# EAGLE board MCBMiniV5 (EAGLE 5.09)
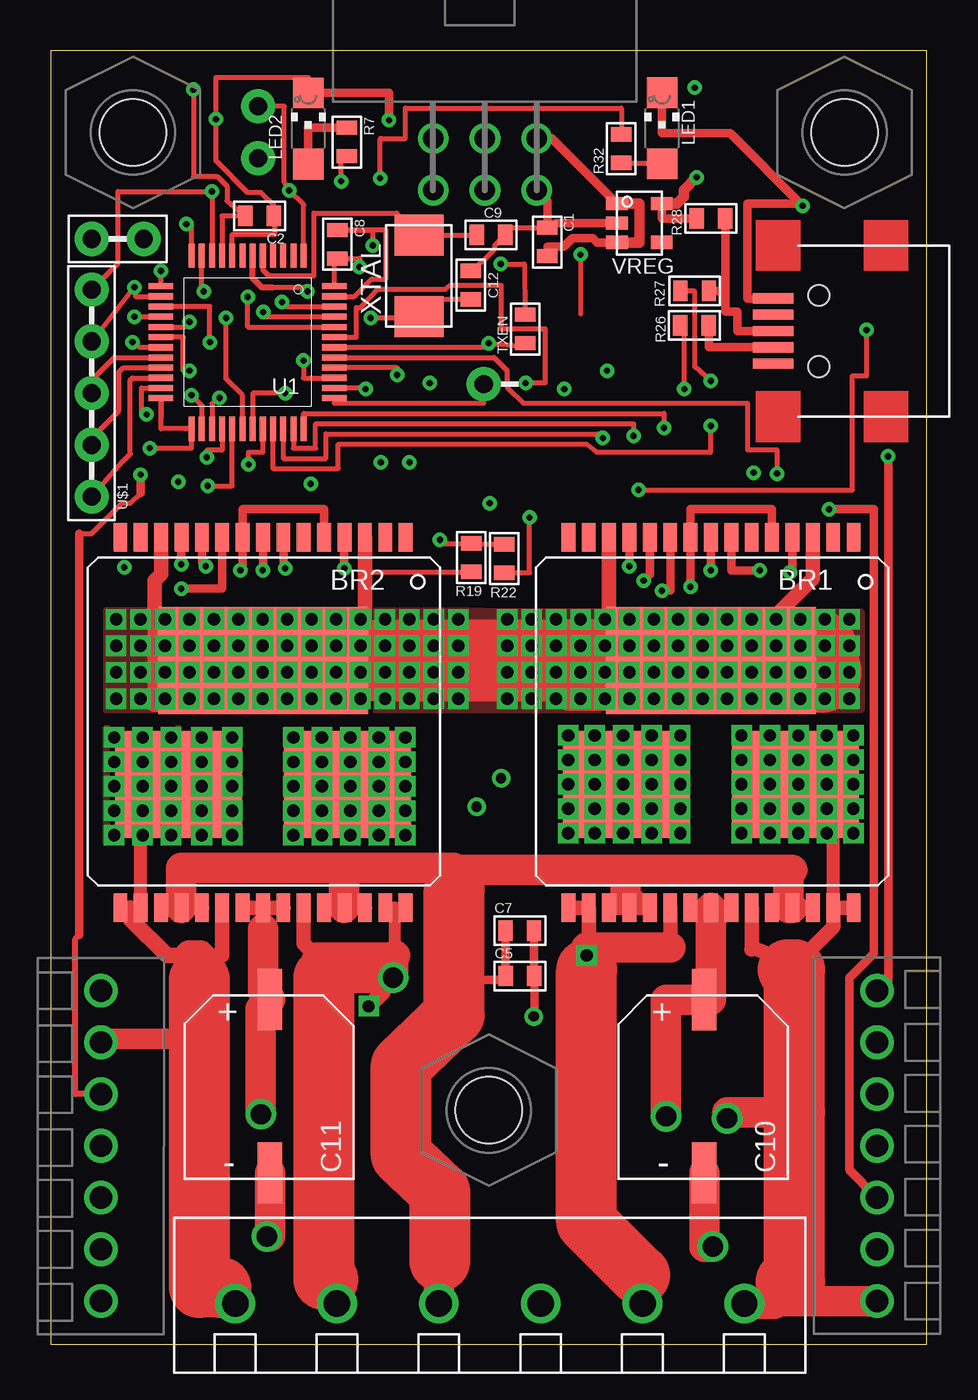
[diagram p0: board, top side]
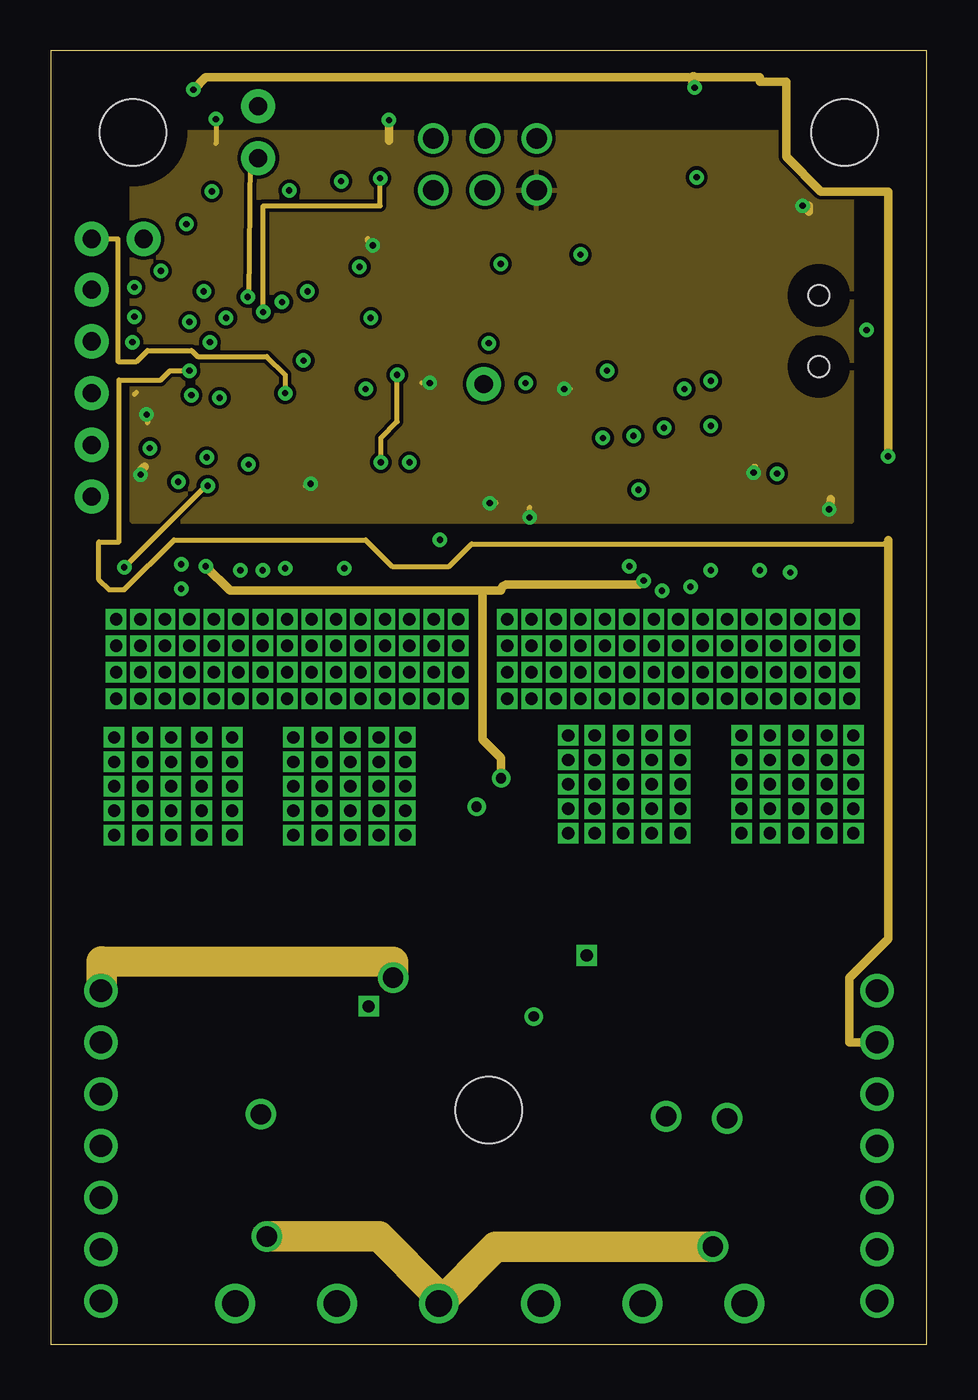
[diagram p1: board, inner layer Route2]
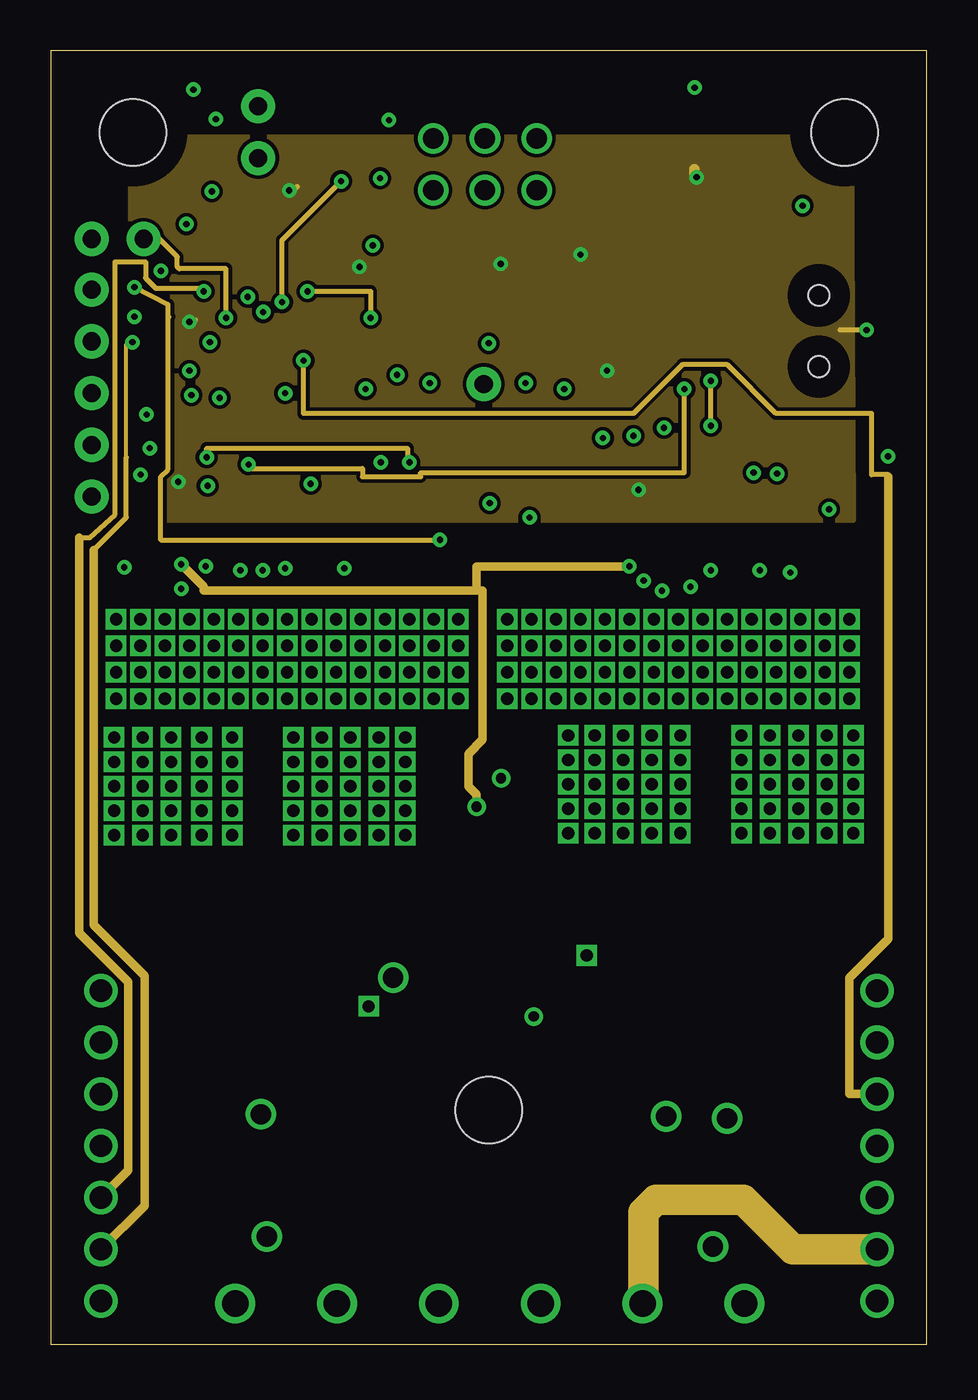
[diagram p2: board, inner layer Route3]
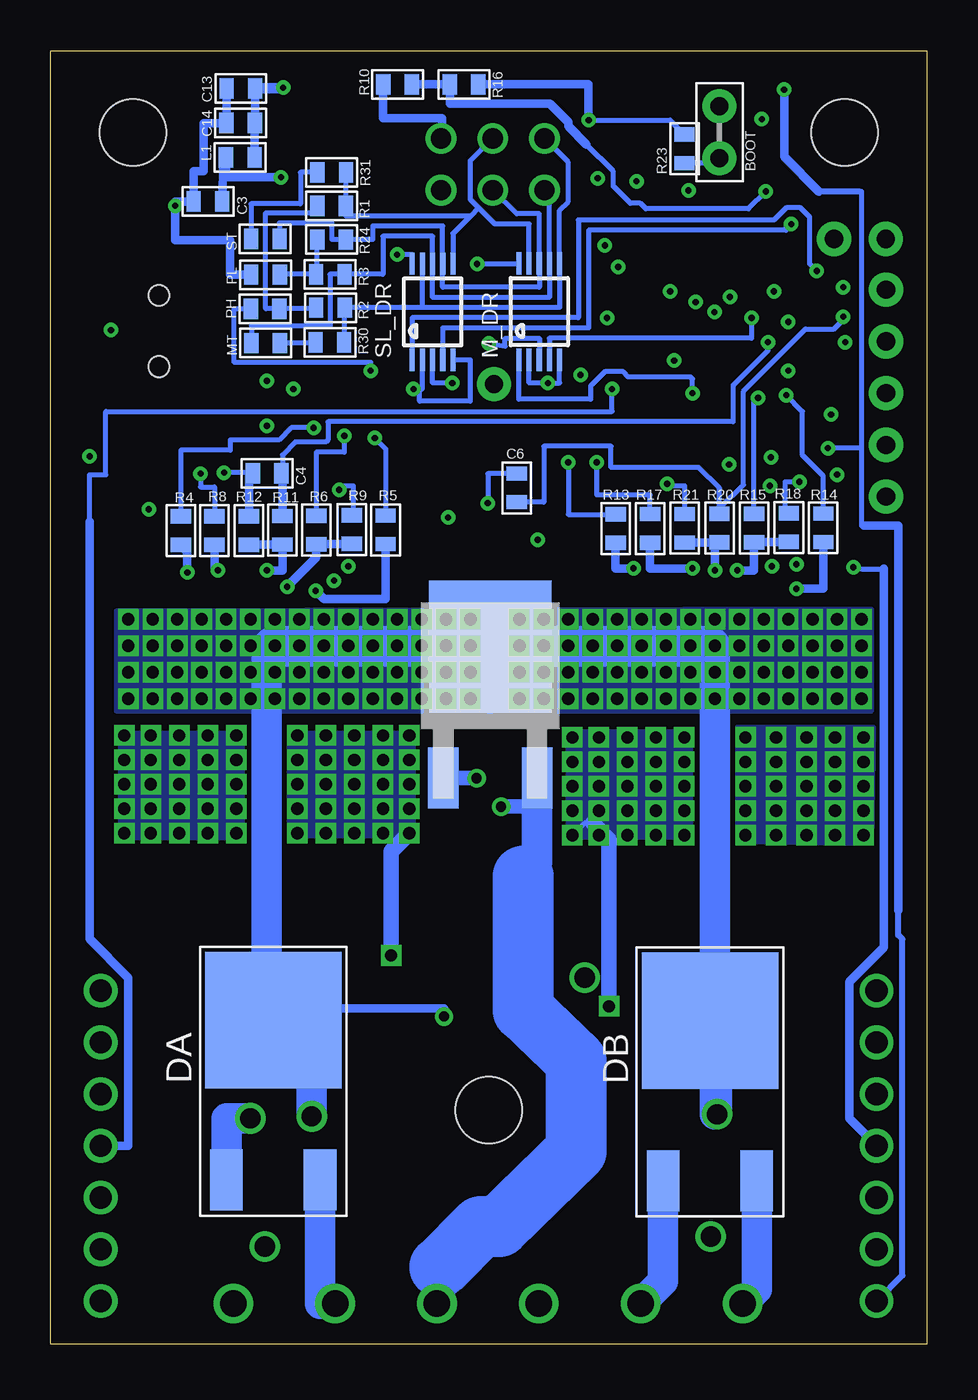
[diagram p3: board, bottom side, seen from below]

Size 43 x 63.5 mm. Coordinates in mm from the lower left corner, seen from the top.
Outline: 0,0 43,0 43,63.5 0,63.5 0,0
Copper layers (1*2+3*16): Top 0.035mm / dielectric 1.5mm / Route2 0.035mm / dielectric 0.15mm / Route3 0.035mm / dielectric 0.2mm / Bottom 0.035mm
Design rules "default *": minimum track width 7mil, minimum drill 12mil, track to track 7mil, track to pad 7mil, pad to pad 7mil, via to via 7mil, smd to smd 7mil, copper to edge 40mil, drill to drill 8mil, minimum pad ring 10mil, minimum via ring 8mil, stop-mask expansion 4mil, vias tented up to drill 0mil, thermal gap 10mil

## Footprints (pad centres in the part's own frame; a part is rotated, then mirrored left to right if it is on the bottom)
2-PIN-100MIL = drill 0.889 pad 1.676 round: P$1 0,0; P$2 2.54,0
MULTIPOWERSO-30-SIGGI = smd 6.23 x 5.25: OUTA_SLUG -4.15,3.05; OUTB_SLUG 4.15,3.05 | smd 0.68 x 1.4: P$1 -7,-9.1; P$2 -6,-9.1; P$3 -5,-9.1; P$4 -4,-9.1; P$5 -3,-9.1; P$6 -2,-9.1; P$7 -1,-9.1; P$8 0,-9.1; P$9 1,-9.1; P$10 2,-9.1; P$11 3,-9.1; P$12 4,-9.1; P$13 5,-9.1; P$14 6,-9.1; P$15 7,-9.1; P$16 7,9.1; P$17 6,9.1; P$18 5,9.1; P$19 4,9.1; P$20 3,9.1; P$21 2,9.1; P$22 1,9.1; P$23 0,9.1; P$24 -1,9.1; P$25 -2,9.1; P$26 -3,9.1; P$27 -4,9.1; P$28 -5,9.1; P$29 -6,9.1; P$30 -7,9.1 | smd 10.3 x 5.25: VCC_SLUG 0,-3.05
0603 = smd 0.7 x 1: 1 -0.7,0; 2 0.7,0
HAO = smd 1.2 x 3: + 0,5; - 0,-3.5
6PIN-HEADER-DUALROW = drill 1 round: P$1 -2.54,0; P$2 -2.54,2.54; P$3 0,0; P$4 0,2.54; P$5 2.54,0; P$6 2.54,2.54
DPAK = smd 1.6 x 3: 1 -2.3,-7.85; 2 2.3,-7.85 | smd 6.7 x 6.7: 3 0,0
TO-252 = smd 6 x 6.5: D 0,6.44 | smd 1.5 x 3: G -2.3,0; S 2.3,0
0603' = smd 0.7 x 1: 1 -0.64,-0.19; 2 0.76,-0.19
CHIPLED_1206 = smd 1.5 x 1.5: A 0,-1.75; C 0,1.75
7-PIN-2.54-TERMINAL-BLOCK = drill 1.1 round: P$1 -7.62,0; P$2 -5.08,0; P$3 -2.54,0; P$4 0,0; P$5 2.54,0; P$6 5.08,0; P$7 7.62,0
MSOP-10 = smd 0.25 x 1.1: 1 -0.88,-2.923; 2 -0.38,-2.923; 3 0.12,-2.923; 4 0.62,-2.923; 5 1.12,-2.923; 6 1.12,1.803; 7 0.62,1.803; 8 0.12,1.803; 9 -0.38,1.803; 10 -0.88,1.803
6-PIN-5MM = drill 1.3 round: P$1 -15,0; P$2 -10,0; P$3 -5,0; P$4 0,0; P$5 5,0; P$6 10,0
LQFP48 = smd 0.3 x 1.2: P1 -2.75,-4.25; P2 -2.25,-4.25; P3 -1.75,-4.25; P4 -1.25,-4.25; P5 -0.75,-4.25; P6 -0.25,-4.25; P7 0.25,-4.25; P8 0.75,-4.25; P9 1.25,-4.25; P10 1.75,-4.25; P11 2.25,-4.25; P12 2.75,-4.25; P25 2.75,4.25; P26 2.25,4.25; P27 1.75,4.25; P28 1.25,4.25; P29 0.75,4.25; P30 0.25,4.25; P31 -0.25,4.25; P32 -0.75,4.25; P33 -1.25,4.25; P34 -1.75,4.25; P35 -2.25,4.25; P36 -2.75,4.25 | smd 1.2 x 0.3: P13 4.25,-2.75; P14 4.25,-2.25; P15 4.25,-1.75; P16 4.25,-1.25; P17 4.25,-0.75; P18 4.25,-0.25; P19 4.25,0.25; P20 4.25,0.75; P21 4.25,1.25; P22 4.25,1.75; P23 4.25,2.25; P24 4.25,2.75; P37 -4.25,2.75; P38 -4.25,2.25; P39 -4.25,1.75; P40 -4.25,1.25; P41 -4.25,0.75; P42 -4.25,0.25; P43 -4.25,-0.25; P44 -4.25,-0.75; P45 -4.25,-1.25; P46 -4.25,-1.75; P47 -4.25,-2.25; P48 -4.25,-2.75
5-PIN-100MIL = drill 0.889 pad 1.676 round: P$1 -5.08,0; P$2 -2.54,0; P$3 0,0; P$4 2.54,0; P$5 5.08,0
CONNECTOR_TV = drill 0.889 pad 1.676 round: P$1 0,0
4-40_NUT_DRILL = hole 3.264: 0,0
UX60-MINI-USB = smd 0.5 x 2: 1 -1.6,2.25; 2 -0.8,2.25; 3 0,2.25; 4 0.8,2.25; 5 1.6,2.25 | hole 1.016: -1.75,0; 1.75,0
SOT-23-5 = smd 0.65 x 1.06: 1 0,0; 2 0.95,0; 3 1.9,0; 4 1.9,2.2; 5 0,2.2
2SMD = smd 2 x 2.4: P$1 0,0; P$2 4,0

## Placement (x,y rotation side)
BOOT  2PIN-100MILL  [2-PIN-100MIL]  10.18,58.24 90 bottom
BR1  VNH5019A-E  [MULTIPOWERSO-30-SIGGI]  32.4,30.53 180 top
BR2  VNH5019A-E  [MULTIPOWERSO-30-SIGGI]  10.41,30.53 180 top
C1  1uF  [0603]  24.37,54.12 270 top
C2  0.1uF  [0603]  10.25,55.39 180 top
C3  2.2uF  [0603]  35.29,56.11 0 bottom
C4  33nF  [0603]  32.39,42.77 0 bottom
C5  0.1uF  [0603]  23.03,18.09 0 top
C6  33nF  [0603]  20.13,42.05 270 bottom
C7  0.1uF  [0603]  23.02,20.32 0 top
C8  0.1uF  [0603]  14.06,54.01 270 top
C9  18pF  [0603]  21.6,54.46 180 top
C10  220uF  [HAO]  32.07,11.93 0 top
C11  220uF  [HAO]  10.75,11.93 0 top
C12  18pF  [0603]  20.61,52 270 top
C13  10uF  [0603]  33.67,61.66 0 bottom
C14  0.1uF  [0603]  33.68,59.96 0 bottom
COMM  6PIN-RIBBONCABLE-BOARDHEADER  [6PIN-HEADER-DUALROW]  21.31,59.21 180 top
DA  STPS15L45CB  [DPAK]  32.08,15.93 0 bottom
DB  STPS15L45CB  [DPAK]  10.65,15.89 0 bottom
FET  MOSFET-N-FDD8896  [TO-252]  21.43,27.81 0 bottom
L1  2.5 kOhm  [0603']  33.76,58.46 0 bottom
LED1  [CHIPLED_1206]  30,59.7 0 top
LED2  [CHIPLED_1206]  12.63,59.69 0 top
M1_CON  7-PIN-MOTOR-CONNECTOR  [7-PIN-2.54-TERMINAL-BLOCK]  40.56,9.75 90 top
M2_CON  7-PIN-MOTOR-CONNECTOR  [7-PIN-2.54-TERMINAL-BLOCK]  2.46,9.75 270 top
M_DR  ISL3173EIUZ  [MSOP-10]  19.14,51.27 0 bottom
MT  0  [0603]  32.46,49.16 180 bottom
PH  0  [0603]  32.49,50.85 0 bottom
PL  0  [0603]  32.47,52.52 0 bottom
POWER_CON  6-PIN-5MM-CONNECTOR  [6-PIN-5MM]  24.05,2.01 0 top
R1  1k  [0603]  29.22,55.9 0 bottom
R2  1k  [0603]  29.28,50.9 0 bottom
R3  1k  [0603]  29.29,52.54 0 bottom
R4  1k  [0603]  36.62,39.95 90 bottom
R5  1k  [0603]  26.57,39.99 90 bottom
R6  1k  [0603]  29.97,39.98 90 bottom
R7  3k3  [0603]  14.52,59.03 270 top
R8  1k  [0603]  34.97,39.96 90 bottom
R9  3k3  [0603]  28.23,40 270 bottom
R10  5k6  [0603]  25.98,61.86 0 bottom
R11  10k  [0603]  31.63,39.97 90 bottom
R12  1k5  [0603]  33.28,39.96 90 bottom
R13  1k  [0603]  15.28,40.05 90 bottom
R14  1k  [0603]  5.08,40.09 90 bottom
R15  1k  [0603]  8.48,40.08 90 bottom
R16  760  [0603]  22.71,61.86 0 bottom
R17  1k  [0603]  13.58,40.06 90 bottom
R18  3k3  [0603]  6.77,40.1 270 bottom
R19  5k6  [0603]  20.64,38.63 90 top
R20  10k  [0603]  10.18,40.08 90 bottom
R21  1k5  [0603]  11.88,40.07 90 bottom
R22  760  [0603]  22.26,38.58 270 top
R23  100R  [0603]  11.9,58.69 90 bottom
R24  1k  [0603]  29.23,54.24 0 bottom
R26  22  [0603]  31.6,50.02 180 top
R27  22  [0603]  31.6,51.71 180 top
R28  1.5k  [0603]  32.4,55.27 180 top
R30  120  [0603]  29.3,49.19 180 bottom
R31  120  [0603]  29.21,57.54 180 bottom
R32  3k3  [0603]  28,58.7 90 top
SL_DR  ISL3173EIUZ  [MSOP-10]  24.38,51.25 0 bottom
ST  0  [0603]  32.47,54.27 180 bottom
TTL  2PIN-100MILL  [2-PIN-100MIL]  4.55,54.27 180 top
TXEN  0  [0603]  23.28,49.85 90 top
U1  STM32F373C8  [LQFP48]  9.66,49.2 180 top
U$1  5-PIN-100MIL  [5-PIN-100MIL]  2,46.7 90 top
U$2  CONNECTOR_TV  [CONNECTOR_TV]  21.25,47.15 0 top
U$3  [4-40_NUT_DRILL]  21.5,11.5 0 top
U$4  [4-40_NUT_DRILL]  38.96,59.5 0 top
U$5  [4-40_NUT_DRILL]  4.03,59.5 0 top
USB_CONN  MINIUSB  [UX60-MINI-USB]  37.7,49.75 90 top
VREG  MIC5235  [SOT-23-5]  27.79,56 270 top
XTAL  7A-8.000MAAJ-T  [2SMD]  18.06,54.45 270 top

## Library data of the parts
BOOT C10 C11 COMM DA DB FET L1 M1_CON M2_CON M_DR POWER_CON SL_DR TTL U$1-U$5 VREG XTAL = soa
BR1 BR2 = st-microelectronics
C1-C9 C12-C14 LED1 LED2 MT PH PL R1-R24 R26-R28 R30-R32 ST TXEN = huggable
U1 = STM32F373C8
USB_CONN = usb

## Nets
+3V3: BOOT.P$2 C3.2 C8.2 L1.1 M_DR.10 PH.1 R9.1 R18.1 R28.2 SL_DR.10 TXEN.2 U1.P1 U1.P17 U1.P48 VREG.5
BOOT: BOOT.P$1 R23.1 U1.P44
CP: BR1.P$11 BR2.P$11 FET.G
FET_VCC: BR1.P$3 BR1.P$13 BR1.P$22 BR1.P$23 BR1.P$24 BR1.VCC_SLUG BR2.P$3 BR2.P$13 BR2.P$22 BR2.P$23 BR2.P$24 BR2.VCC_SLUG C5.2 C7.2 C10.+ C11.+ DA.3 DB.3 FET.D R19.1
GND: C1.1 C2.1 C3.1 C4.1 C6.1 C8.1 C9.1 C12.1 C13.1 C14.1 COMM.P$2 LED1.C LED2.C M1_CON.P$3 M2_CON.P$3 M_DR.2 M_DR.5 PL.1 R12.2 R16.2 R21.2 R22.2 R23.2 SL_DR.2 SL_DR.5 U1.P8 U1.P23 U1.P47 USB_CONN.5 VREG.2
LED1: R32.2 U1.P45
LED2: R7.2 U1.P46
M1_CS: C4.2 R11.2 U1.P15
M1_DIAG_A: R6.2 U1.P35
M1_ENCA: M1_CON.P$4 U1.P38
M1_ENCB: M1_CON.P$5 U1.P39
M1_IN_A: R4.2 U1.P36
M1_IN_B: R5.2 U1.P34
M1_OUTA: BR1.OUTA_SLUG BR1.P$25 BR1.P$29 BR1.P$30 DA.1 M1_CON.P$1 POWER_CON.P$6
M1_OUTB: BR1.OUTB_SLUG BR1.P$16 BR1.P$17 BR1.P$21 DA.2 M1_CON.P$2 POWER_CON.P$5
M1_POT: M1_CON.P$6 U1.P18
M1_PWM: R8.2 U1.P41
M2_CS: C6.2 R20.2 U1.P16
M2_DIAG_A: R15.2 U1.P27
M2_ENCA: M2_CON.P$4 U1.P29
M2_ENCB: M2_CON.P$5 U1.P11
M2_IN_A: R13.2 U1.P28
M2_IN_B: R14.2 U1.P26
M2_OUTA: BR2.OUTA_SLUG BR2.P$25 BR2.P$29 BR2.P$30 DB.1 M2_CON.P$1 POWER_CON.P$2
M2_OUTB: BR2.OUTB_SLUG BR2.P$16 BR2.P$17 BR2.P$21 DB.2 M2_CON.P$2 POWER_CON.P$1
M2_POT: M2_CON.P$6 U1.P19
M2_PWM: R17.2 U1.P40
MASTER_RX: M_DR.1 TTL.P$2 U1.P31
MASTER_TX: M_DR.4 TTL.P$1 U1.P30
MASTER_TX_EN: M_DR.3 TXEN.1 U1.P42
MASTER_WR_BUS_A: COMM.P$5 M_DR.6 R2.2 R30.1 SL_DR.9
MASTER_WR_BUS_B: COMM.P$6 M_DR.7 MT.2 R3.2 SL_DR.8
N$1: PH.2 R1.1 R2.1
N$2: BR2.P$4 R13.1
N$3: PL.2 R3.1 R24.1
N$4: R31.2 ST.2
N$5: BR1.P$8 R11.1 R12.1
N$6: BR2.P$10 R14.1
N$8: BR2.P$5 BR2.P$9 R15.1 R18.2
N$9: BR2.P$7 R17.1
N$10: BR1.P$4 R4.1
N$11: BR1.P$10 R5.1
N$12: LED2.A R7.1
N$13: BR1.P$5 BR1.P$9 R6.1 R9.2
N$14: BR1.P$7 R8.1
N$15: BR2.P$8 R20.1 R21.1
N$16: MT.1 R30.2
N$19: LED1.A R32.1
OSC_IN: C9.2 U1.P5 XTAL.P$1
OSC_OUT: C12.2 U1.P6 XTAL.P$2
PGND: BR1.P$18 BR1.P$19 BR1.P$20 BR1.P$26 BR1.P$27 BR1.P$28 BR2.P$18 BR2.P$19 BR2.P$20 BR2.P$26 BR2.P$27 BR2.P$28 C5.1 C7.1 C10.- C11.- POWER_CON.P$3
SLAVE_RX: SL_DR.1 U1.P13
SLAVE_TX: SL_DR.4 U1.P12
SLAVE_TX_EN: SL_DR.3 U1.P43
SLAVE_WR_BUS_A: COMM.P$3 M_DR.9 R1.2 R31.1 SL_DR.6
SLAVE_WR_BUS_B: COMM.P$4 M_DR.8 R24.2 SL_DR.7 ST.1
USB_D+: R27.1 R28.1 USB_CONN.3
USB_D-: R26.1 USB_CONN.2
USB_M: R26.2 U1.P32
USB_P: R27.2 U1.P33
VCC: BR1.P$12 BR2.P$12 FET.S POWER_CON.P$4
VCC_AN: R19.2 R22.1 U1.P14 U$1.P$4
VDDA: C2.2 C13.2 C14.2 L1.2 M1_CON.P$7 M2_CON.P$7 U1.P9 U1.P24 U1.P25
VIN: C1.2 COMM.P$1 R10.1 VREG.1 VREG.3
VIN_AN: R10.2 R16.1 U1.P10 U$1.P$5
XTRA1: U1.P20 U$1.P$3
XTRA2: U1.P21 U$1.P$2
XTRA3: U1.P22 U$1.P$1
XTRA4: U1.P37 U$2.P$1

## Tracks (layer width: path | path; a pad name or v marks a point on that pad's centre or on a via)
+3V3  (via drill 0.3)
  Top 0.254: v27.3,47.8 27.26,47.8 | v26,53.5 26,50.59 | TXEN.2 23.24,53.04 v22.08,53.04 | U1.P48 13.91,53.31 C8.2 15.15,53.31 v15.15,52.9 | v28.85,41.95 39.35,41.95 39.35,47.55 40.05,47.55 v40.05,49.8 | U1.P17 6.55,49.95 v6.8,50.2 | U1.P1 12.41,55.94 v11.7,56.65 11.45,57.05 11.45,60.78 BOOT.P$2
  Top 0.406: R28.2 29.99,55.27 VREG.5
  Top 0.508: VREG.5 30.73,56 31.07,56.34 31.07,56.67 v31.7,57.3
  Route3 0.254: v40.05,49.8 38.75,49.8 | v6.25,42.35 6.25,42.55 6.2,42.55 | v6.8,50.2 7,50.2 7.1,50.3 | v11.7,56.65 11.9,56.65 12.1,56.85 | v15.15,52.9 15,52.9
  Route3 0.508: v31.7,57.3 31.6,57.4 31.6,57.7
  Bottom 0.254: PH.1 34,50.85 34,48.2 27.3,48.2 v27.3,47.8 | SL_DR.10 25.26,53.5 v26,53.5 | M_DR.10 20.03,53.03 v22.08,53.04 | R9.1 28.15,40.78 28.15,42.15 28.85,42.15 v28.85,41.95 | R18.1 6.95,40.8 6.95,42.35 v6.25,42.35
  Bottom 0.406: C3.2 34.51,58.16 L1.1 34.4,57.3 v31.7,57.3
  pour Route3: 4,40.45 3.9,59.3 39.3,59.3 39.4,40.45
BOOT  (via drill 0.3)
  Top 0.254: U1.P44 9.66,49.95 v9.66,51.43
  Route2 0.254: v9.66,51.43 9.73,51.43 9.8,58.15 10.18,58.15 BOOT.P$1
  Bottom 0.254: BOOT.P$1 10.23,57.99 R23.1
CP  (via drill 0.3, 0.5)
  Top 0.406: BR2.P$11 7.41,38.39 v7.6,38.2 | BR1.P$11 29.4,37.8 v29.1,37.5
  Route2 0.406: v7.6,38.2 8.8,37 21.2,37 | v29.1,37.5 28.9,37.3 22.4,37.3 arc90 22.1,37 21.2,37 | 21.2,37 21.2,29.7 22.1,28.8 v22.1,27.8
  Bottom 0.7: v22.1,27.8 FET.G
FET_VCC  (via drill 0.5, 0.6, 1)
  Top 0.254: R19.1 15.41,37.93 15.41,37.7
  Top 0.406: C7.2 C5.2 23.73,16.1 v23.7,16.1
  Top 0.7: BR2.P$23 BR2.P$22 | BR2.P$23 BR2.P$24 | 6.1,33.58 5.41,33.58 | BR2.P$3 15.41,37.7 15.41,33.58 13.5,33.58 BR2.VCC_SLUG 6.1,33.58 | BR1.P$13 27.4,33.58 BR1.VCC_SLUG | BR1.P$24 BR1.P$23 BR1.P$22 | BR2.P$23 10.41,20.4 10.4,20.4 | BR1.P$3 37.4,37.6 34,34.2 34,33.7 | BR2.P$13 5.41,37.81 5.1,37.5 5.1,31.4 6.1,31.4 6.1,33.58
  Top 1.5: 16.7,34.3 14.7,34.3 14.7,35.2 10.41,35.2 BR2.VCC_SLUG | BR1.VCC_SLUG 32.4,34.4 26,34.4 | BR1.P$23 32.4,16.93 C10.+ 30.2,16.93 v30.2,11.2 | 10.41,20.4 10.41,17.27 C11.+ 10.3,16.48 v10.3,11.3
  Top 4: 34,33.7 34.7,33 37.8,33 37.6,33.2 37.6,34.1 37.1,33.6 25.1,33.6 25.6,33.1 27.3,33.1 26.82,33.58 13.5,33.58
  Bottom 0.406: v23.7,16.1 23.7,16.5 30.2,16.5 30.2,15.93
  Bottom 1.5: 10.3,15.89 DB.3 arc90 10.3,15.55 v10.3,11.3 10.41,11.3 10.41,34.25 10.65,34.25 | 16.7,34.3 16.7,34.25 20.4,34.25 FET.D 26,34.25 26,34.4 | v30.2,11.2 30.2,15.93 DA.3 32.4,15.93 32.4,34.25 32.08,34.25
  Bottom 2: 10.65,34.25 20.4,34.25 | FET.D 32.08,34.25
  other vias: 3.2,35.6 4.4,35.6 5.6,35.6 6.8,35.6 3.2,34.3 4.4,34.3 5.6,34.3 6.8,34.3 3.2,33 4.4,33 5.6,33 6.8,33 3.2,31.7 4.4,31.7 5.6,31.7 6.8,31.7 8,35.6 9.2,35.6 10.4,35.6 11.6,35.6 8,34.3 9.2,34.3 10.4,34.3 11.6,34.3 8,33 9.2,33 10.4,33 11.6,33 8,31.7 9.2,31.7 10.4,31.7 11.6,31.7 12.8,31.7 14,31.7 15.2,31.7 16.4,31.7 12.8,33 14,33 15.2,33 16.4,33 12.8,34.3 14,34.3 15.2,34.3 16.4,34.3 12.8,35.6 14,35.6 15.2,35.6 16.4,35.6 17.6,31.7 18.8,31.7 20,31.7 17.6,33 18.8,33 20,33 17.6,34.3 18.8,34.3 20,34.3 17.6,35.6 18.8,35.6 20,35.6 22.4,31.7 23.6,31.7 24.8,31.7 26,31.7 22.4,33 23.6,33 24.8,33 26,33 22.4,34.3 23.6,34.3 24.8,34.3 26,34.3 22.4,35.6 23.6,35.6 24.8,35.6 26,35.6 27.2,31.7 28.4,31.7 29.6,31.7 30.8,31.7 27.2,33 28.4,33 29.6,33 30.8,33 27.2,34.3 28.4,34.3 29.6,34.3 30.8,34.3 27.2,35.6 28.4,35.6 29.6,35.6 30.8,35.6 32,35.6 33.2,35.6 34.4,35.6 35.6,35.6 32,34.3 33.2,34.3 34.4,34.3 35.6,34.3 32,33 33.2,33 34.4,33 35.6,33 32,31.7 33.2,31.7 34.4,31.7 35.6,31.7 36.8,31.7 38,31.7 39.2,31.7 36.8,33 38,33 39.2,33 36.8,34.3 38,34.3 39.2,34.3 36.8,35.6 38,35.6 39.2,35.6
  pour Top: 2.7,31.1 2.7,36.1 39.8,36 39.8,31.1
  pour Bottom: 2.7,31.1 2.7,36.1 39.8,36 39.8,31.1
GND  (via drill 0.3)
  Top 0.254: R22.2 23.5,37.88 v23.5,40.6 | U1.P47 14.9,51.45 15.75,52.3 16.45,52.3 16.45,54.71 C8.1 15.8,54.71 v15.8,53.95 | 24.32,54.77 C1.1 22.3,54.82 C9.1 21.8,53.96 21.8,53.8 20.7,52.7 C12.1 | 1.4,39.8 2,39.8 3.5,41.3 3.9,41.3 4.4,41.8 | U1.P23 4.45,46.95 4.45,45.65 v4.7,45.65 | LED2.C 12.63,62.2 8.1,62.2 v8.1,60.15 8.1,58.1 9.65,56.55 10.3,56.55 10.95,55.9 C2.1 11,55.24 11,54.5 8.91,54.5 U1.P8
  Top 0.305: M2_CON.P$3 1.2,12.29 1.2,19.9 1.4,20.1
  Top 0.406: M1_CON.P$3 39.2,8.57 39.2,18 40.4,19.2 40.4,41 v38.2,41 | 1.4,20.1 1.4,39.8 | 4.4,41.8 v4.4,42.7 | LED2.C 16.6,61.44 v16.6,60.1 | VREG.2 24.8,55.05 C1.1 24.37,56.14 COMM.P$2 | USB_CONN.5 34.2,51.35 34.2,56 36.9,56 v36.9,55.9 33.35,59.45 30,59.45 LED1.C
  Route2 0.254: v25.2,46.9 25.5,46.9 | v18.6,47.2 18.2,47.2 | v23.5,40.6 23.5,41.1 | v34.5,42.8 34.5,43.1 34.6,43.1 | v21.55,41.3 21.85,41.3 21.85,41.35 | v12.75,42.25 12.75,42.15 12.5,42.15 | 4.1,46.65 4.2,46.75 | v4.7,45.65 4.75,45.65 4.75,45.25 | v8.1,60.15 8.1,58.95 | v15.8,53.95 15.55,54.15 15.55,54.3
  Route2 0.406: v4.4,42.7 4.4,42.9 4.6,43.1 | v38.2,41 38.3,41.4 38.3,41.5 | v16.6,60.1 16.6,59.1 | v36.9,55.9 37.2,55.9 37.2,55.6
  Bottom 0.254: M_DR.2 19.52,47.2 v18.6,47.2 18.02,47.2 M_DR.5 | SL_DR.5 22.4,48.33 22.4,46.3 24.9,46.3 24.9,46.9 v25.2,46.9 24.76,46.9 SL_DR.2 | C4.1 33.09,42.8 v34.5,42.8 | C6.1 21.55,42.75 v21.55,41.3 | R21.2 11.88,42.15 12.75,42.15 v12.75,42.25 | R23.2 12.6,60.1 v16.6,60.1
  Bottom 0.406: C4.1 33.28,42.77 R12.2 | R16.2 16.6,61.86 v16.6,60.1 | C13.1 34.38,61.65 C14.1 35.5,59.96 35.5,57.6 35.99,57.6 C3.1 36.9,56.11 v36.9,55.9 36.9,54.2 34.2,54.2 34.2,52.52 PL.1
  pour Route2: 4,59.5 39.3,59.5 39.3,40.4 4,40.4
LED1  (via drill 0.3)
  Top 0.254: R32.2 28,60.7 17.4,60.7 17.4,59.2 16.25,59.2 16.16,59.2 v16.16,57.25 | U1.P45 10.32,50.45 v10.42,50.68
  Route2 0.254: v10.42,50.68 10.42,55.9 16.16,55.9 v16.16,57.25
LED2  (via drill 0.3)
  Top 0.254: U1.P46 11.57,50.95 v11.35,51.17 | v14.25,57.1 14.25,58.06 R7.2
  Route3 0.254: v11.35,51.17 11.35,54.2 v14.25,57.1
M1_CS  (via drill 0.3)
  Top 0.254: v7.8,49.2 7.8,50.95 U1.P15
  Bottom 0.254: v7.8,49.2 7.8,48.8 9.5,47.1 9.5,45.3 29.4,45.3 29.4,44.4 29.5,44.3 31,44.3 31.63,43.67 31.63,42.77
  Bottom 0.406: C4.2 31.63,42.77 R11.2
M1_DIAG_A  (via drill 0.3)
  Top 0.254: U1.P35 11.91,44 13,44 13,45.2 28.6,45.2 v28.6,44.6
  Bottom 0.254: R6.2 29.97,43.8 28.6,43.8 v28.6,44.6
M1_ENCA  (via drill 0.3)
  Top 0.254: U1.P38 15.45,46.95 v15.45,46.9
  Bottom 0.254: v15.45,46.9 15.45,45.8 40.3,45.8 40.3,42.7 41.1,42.7 41.1,40.4
  Bottom 0.406: M1_CON.P$4 39.2,9.75 39.2,18 41.1,19.9 41.1,40.4
M1_ENCB  (via drill 0.3)
  Top 0.254: v12.4,48.3 12.4,47.45 U1.P39
  Route3 0.254: 41.1,42.6 41.1,42.7 40.3,42.7 40.3,45.7 35.6,45.7 33.2,48.1 31,48.1 28.6,45.7 12.4,45.7 v12.4,48.3
  Route3 0.406: M1_CON.P$5 39.2,12.29 39.2,18 41.1,19.9 41.1,42.6
M1_IN_A  (via drill 0.3)
  Top 0.254: 12.41,44.5 U1.P36 12.41,45.7 30.1,45.7 v30.1,45
  Bottom 0.254: R4.2 36.62,43.9 34.2,43.9 34.2,44.4 31.8,44.4 31.2,45 v30.1,45
M1_IN_B  (via drill 0.3)
  Top 0.254: U1.P34 11.41,43.5 13.5,43.5 13.5,44.7 26.9,44.7 v27.1,44.5
  Bottom 0.254: 26.5,40.69 R5.2 26.57,43.97 v27.1,44.5
M1_OUTA  (via drill 0.6, 1)
  Top 0.635: BR1.P$29 38.4,27.48 BR1.OUTA_SLUG
  Top 0.7: BR1.P$30 BR1.P$29 38.4,20.5 37.2,19.3 36.7,19.3 36.2,18.8 34.4,19.5 | 34.4,19.5 34.4,19.4 | 34.4,19.5 BR1.P$25
  Top 1.5: 36.2,18.8 36.3,18.4 36.2,18.4 | M1_CON.P$1 36.1,2.13 36.1,2.6 | 36.1,2.6 36.1,3.1 | v33.2,11.1 33.2,11.4 36.5,11.4 | POWER_CON.P$6 35.51,2.01 36.1,2.6
  Top 3: 36.2,18.4 36.5,18.4 36.5,11.4 36.5,3.1 36.1,3.1
  Bottom 1.5: DA.1 34.38,11.1 v33.2,11.1
  other vias: 33.9,29.9 33.9,28.7 33.9,27.5 33.9,25.1 33.9,26.3 35.3,29.9 35.3,28.7 35.3,27.5 35.3,25.1 35.3,26.3 36.7,29.9 36.7,28.7 36.7,27.5 36.7,25.1 36.7,26.3 38.1,29.9 38.1,28.7 38.1,27.5 38.1,25.1 38.1,26.3 39.4,29.9 39.4,28.7 39.4,27.5 39.4,25.1 39.4,26.3
  pour Top: 33.6,30 39.6,30 39.6,24.9 33.6,24.9
  pour Bottom: 33.6,30 39.6,30 39.6,24.9 33.6,24.9
M1_OUTB  (via drill 0.6)
  Top 0.7: POWER_CON.P$5 28.3,2.76 28.3,3.6 | BR1.P$21 30.4,19.5 26.4,19.5 BR1.P$17 BR1.P$16
  Top 1.5: 30.4,19.5 26.3,19.5 v26.3,19.1 26.3,18.6 26.3,18.4 26.3,17.7 | 28.9,3.4 28.9,2.16 POWER_CON.P$5
  Top 3: 26.3,18.4 26.3,6 28.9,3.4
  Route3 1.5: M1_CON.P$2 36.43,4.67 34,7.1 29.7,7.1 29.1,6.5 29.1,2.06 POWER_CON.P$5
  Bottom 0.762: v25.4,25.1 26.3,24.2 v26.3,19.1
  Bottom 1.5: POWER_CON.P$5 29.78,2.01 DA.2
  other vias: 30.9,29.9 30.9,28.7 30.9,27.5 30.9,25.1 30.9,26.3 29.5,29.9 29.5,28.7 29.5,27.5 29.5,25.1 29.5,26.3 28.1,29.9 28.1,28.7 28.1,27.5 28.1,25.1 28.1,26.3 26.7,29.9 26.7,28.7 26.7,27.5 26.7,25.1 26.7,26.3 25.4,29.9 25.4,28.7 25.4,27.5 25.4,26.3
  pour Bottom: 25.2,30 31.3,30 31.3,25 25.2,25
  pour Top: 25.2,30.3 31.3,30.3 31.3,25 25.2,25
M1_POT  (via drill 0.3)
  Top 0.254: U1.P18 6.5,49.45 6.5,47.8 v6.8,47.8
  Route2 0.254: 41.1,39.5 40.9,39.3 20.65,39.3 19.55,38.2 16.75,38.2 15.45,39.5 6.05,39.5 3.6,37.05 2.85,37.05 2.35,37.55 2.35,39.4 3.35,39.4 3.35,47.35 5.4,47.35 5.85,47.8 v6.8,47.8
  Route2 0.406: M1_CON.P$6 39.2,14.83 39.2,18 41.1,19.9 41.1,39.5
M1_PWM  (via drill 0.3)
  Top 0.254: v35.65,42.75 35.65,43.92 34.2,43.92 34.2,46.2 23.2,46.2 22.4,47 22.4,47.8 21.75,48.45 U1.P41
  Bottom 0.254: R8.2 34.97,42.1 35.65,42.1 v35.65,42.75
M2_CS  (via drill 0.3)
  Top 0.254: v4.1,50.45 U1.P16
  Bottom 0.254: 4.3,50.45 v4.1,50.45 4.1,50.3 4.55,49.85 5.95,49.85 9,46.8 9,42.2 10.15,41.05 10.15,40.81 | C6.2 18.8,41.35 18.8,44.1 15.5,44.1 15.5,43.05 11.2,43.05 10.18,42.03 R20.2
  Bottom 0.406: 10.15,40.81 R20.2
M2_DIAG_A  (via drill 0.3)
  Top 0.254: U1.P27 7.91,46.21 v8.28,46.47
  Bottom 0.254: R15.2 8.48,46.6 v8.28,46.47
M2_ENCA  (via drill 0.3)
  Top 0.254: U1.P29 8.91,42.15 v7.7,42.15
  Route2 0.254: v7.7,42.15 7.6,42.15 v3.6,38.15
  Bottom 0.254: v3.6,38.15 3.15,38.05 2.1,38.05
  Bottom 0.406: 2.1,38.1 2.1,38.05 2.1,19.5 3.8,17.8 3.8,11.1 M2_CON.P$4
M2_ENCB  (via drill 0.3)
  Top 0.254: v7.5,51.7 7.41,51.7 U1.P11
  Route3 0.254: 7.5,51.6 v7.5,51.7 7.35,51.85 5.15,51.85 4.65,52.35 4.65,53.15 3.15,53.15 3.15,40.75 1.9,39.6 1.4,39.6
  Route3 0.406: M2_CON.P$5 3.8,8.56 3.8,17.8 1.4,20.2 1.4,39.6
M2_IN_A  (via drill 0.3)
  Top 0.254: v7.65,43.55 7.65,43.9 8.41,43.9 U1.P28
  Route3 0.254: v7.65,43.55 7.65,44 17.5,44 17.5,43.3 v17.6,43.3
  Bottom 0.254: R13.2 17.6,40.75 v17.6,43.3
M2_IN_B  (via drill 0.3)
  Top 0.254: v6.9,46.6 7.41,46.09 U1.P26
  Bottom 0.254: R14.2 5.08,42.63 6.1,43.65 6.1,45.8 v6.9,46.6
M2_OUTA  (via drill 0.6, 1)
  Top 0.6: BR2.P$30 BR2.P$29 16.9,21.43 16.9,19.1
  Top 0.7: BR2.P$25 12.41,19.69 13.1,19
  Top 0.762: v15.6,16.6 16.3,17.3 16.3,18
  Top 1: 13.6,3.2 13.6,2.01 POWER_CON.P$2
  Top 1.5: 16.8,19 13.1,19 | 16.8,19 16.9,19.1 | 16.8,19 v16.8,18 16.3,18 13.4,18
  Top 3: 13.4,18 13.4,3.2 13.6,3.2
  Route2 1.5: M2_CON.P$1 2.5,17.37 2.5,18.8 16.8,18.77 v16.8,18
  Bottom 0.254: v17.4,25 16.8,25.6 16.4,25.6
  Bottom 0.762: 16.4,25.6 15.6,24.8 v15.6,16.6
  Bottom 1.5: POWER_CON.P$2 12.95,3.11 DB.1
  other vias: 11.9,29.8 11.9,28.6 11.9,27.4 11.9,25 11.9,26.2 13.3,29.8 13.3,28.6 13.3,27.4 13.3,25 13.3,26.2 14.7,29.8 14.7,28.6 14.7,27.4 14.7,25 14.7,26.2 16.1,29.8 16.1,28.6 16.1,27.4 16.1,25 16.1,26.2 17.4,29.8 17.4,28.6 17.4,27.4 17.4,26.2
  pour Top: 11.6,30 17.6,30 17.6,24.9 11.6,24.9
  pour Bottom: 11.6,24.9 17.6,24.9 17.6,30.1 11.6,30.1
M2_OUTB  (via drill 0.6)
  Top 0.635: BR2.P$17 4.41,27.48 BR2.OUTB_SLUG
  Top 0.7: BR2.P$21 8.41,19.1 6.8,19.1 | BR2.P$17 3.9,21.43 BR2.P$16
  Top 0.762: 3.9,21.43 3.9,20.9 5.7,19.1 6.8,19.1
  Top 1: 8.35,2.8 8.35,2.01 POWER_CON.P$1 | M2_CON.P$2 2.46,15 7.3,15
  Top 1.5: 6.8,19.1 7.3,19.1 7.3,17.9
  Top 3: 7.3,17.9 7.3,15 7.3,2.8 8.35,2.8
  Bottom 1.5: POWER_CON.P$1 8.35,2.71 DB.2
  other vias: 3.1,29.8 3.1,28.6 3.1,27.4 3.1,25 3.1,26.2 7.4,29.8 7.4,28.6 7.4,27.4 7.4,25 7.4,26.2 8.9,29.8 8.9,28.6 8.9,27.4 8.9,25 8.9,26.2 5.9,29.8 5.9,28.6 5.9,27.4 5.9,25 5.9,26.2 4.5,29.8 4.5,28.6 4.5,27.4 4.5,25 4.5,26.2
  pour Bottom: 9.3,30.3 9.3,24.7 2.7,24.6 2.6,30.3
  pour Top: 2.7,30.3 9.3,30.3 9.3,24.7 2.7,24.6
M2_POT  (via drill 0.3)
  Top 0.254: v4,49.2 4.35,48.95 U1.P19
  Route3 0.203: 3.7,43.55 3.7,49.1 v4,49.2
  Route3 0.254: 3.7,43.55 3.7,40.6 2.1,39
  Route3 0.406: M2_CON.P$6 4.6,6.82 4.6,18.1 2.1,20.6 2.1,39
M2_PWM  (via drill 0.3)
  Top 0.254: v16.2,43.3 16.2,43.1 | U1.P40 17,47.95 v17,47.6
  Route2 0.254: v17,47.6 17,45.3 16.2,44.5 v16.2,43.3
  Bottom 0.254: R17.2 13.58,41.7 16.2,41.7 v16.2,43.3
MASTER_RX  (via drill 0.3)
  Top 0.254: v11.5,46.7 9.91,46.7 U1.P31
  Route2 0.254: v11.5,46.7 11.5,47.6 10.6,48.5 7.2,48.5 6.9,48.8 4.75,48.8 4.2,48.25 3.3,48.25 3.3,54.27 TTL.P$2
  Bottom 0.254: M_DR.1 20.02,46.4 16.5,46.4 16.5,47.05 15.8,47.75 14.9,47.75 14.65,47.5 11.6,47.5 11.5,47.4 v11.5,46.7
MASTER_TX  (via drill 0.3)
  Top 0.254: U1.P30 9.41,46.59 8.6,47.4 v8.6,50.4
  Route3 0.254: v8.6,50.4 8.6,52.8 6.3,52.8 6.2,52.9 6.2,53.4 5.33,54.27 TTL.P$1
  Bottom 0.254: M_DR.4 18.52,49.4 8.6,49.4 v8.6,50.4
MASTER_TX_EN  (via drill 0.3)
  Top 0.254: TXEN.1 23.28,49 v21.5,49.15 21.5,48.95 U1.P42
  Bottom 0.254: M_DR.3 19.02,49.4 20.7,49.4 20.7,49 v21.5,49.15
MASTER_WR_BUS_A
  Bottom 0.254: 24.76,50.9 SL_DR.9 | 24.76,50.9 18.02,50.9 M_DR.6 18.02,55.68 17.6,56.1 17.6,58.04 COMM.P$5 | 24.76,50.9 27.4,50.9 R2.2 28.6,50.87 R30.1
MASTER_WR_BUS_B
  Bottom 0.254: COMM.P$6 18.52,56.67 M_DR.7 18.52,51.4 24.26,51.4 SL_DR.8 24.26,54.4 26.7,54.4 26.7,52.54 R3.2 29.3,52.54 29.3,50 33.16,50 MT.2
N$1
  Bottom 0.254: R2.1 29.98,50.85 PH.2 32.45,50.85 32.45,55.55 29.92,55.55 R1.1
N$2  (via drill 0.3)
  Top 0.406: BR2.P$4 v14.4,38.1
  Bottom 0.406: v14.4,38.1 15.28,38.1 R13.1
N$3
  Bottom 0.254: PL.2 31.77,52.54 R3.1 29.93,52.54 R24.1
N$4
  Bottom 0.254: ST.2 33.17,56 30.75,56 30.75,57.54 R31.2
N$5  (via drill 0.3)
  Top 0.406: BR1.P$8 v32.4,38
  Bottom 0.406: R12.1 R11.1 31.63,38 v32.4,38
N$6  (via drill 0.3)
  Top 0.406: BR2.P$10 8.41,37.1 v6.4,37.1
  Bottom 0.406: v6.4,37.1 5.08,37.1 R14.1
N$8  (via drill 0.3)
  Top 0.406: BR2.P$5 13.41,41 9.41,41 BR2.P$9 9.41,38 v9.3,38
  Bottom 0.406: R18.2 6.77,39.38 R15.1 8.48,38 v9.3,38
N$9  (via drill 0.3)
  Top 0.406: BR2.P$7 11.41,38.1 v11.5,38.1
  Bottom 0.406: v11.5,38.1 13.58,38.1 R17.1
N$10  (via drill 0.3)
  Top 0.406: 36.48,39.63 BR1.P$4 36.4,38 v36.3,37.9
  Bottom 0.406: v36.3,37.9 36.3,38.93 R4.1
N$11  (via drill 0.3)
  Top 0.406: BR1.P$10 30.4,37 v30,37
  Bottom 0.406: v30,37 29.6,36.6 26.57,36.6 R5.1
N$12
  Top 0.406: LED2.A 12.63,59.73 R7.1
N$13  (via drill 0.3)
  Top 0.406: BR1.P$5 35.4,41 31.4,41 BR1.P$9 v31.4,37.2
  Bottom 0.406: R6.1 30.1,39.28 | R6.1 29.97,39.3 R9.2 | R6.1 29.97,38.63 v31.4,37.2
N$14  (via drill 0.3)
  Top 0.406: v34.8,38 33.4,38 BR1.P$7
  Bottom 0.406: R8.1 34.97,38 v34.8,38
N$15  (via drill 0.3)
  Top 0.406: v10.4,38 10.41,38 BR2.P$8
  Bottom 0.406: v10.4,38 10.4,39.38 R20.1 R21.1
N$16
  Bottom 0.254: MT.1 30,49.16 R30.2
N$19
  Top 0.254: R32.1 30,58 LED1.A
OSC_IN
  Top 0.254: XTAL.P$1 17.89,54.63 | XTAL.P$1 20.33,54.45 C9.2 | U1.P5 10.41,52.74 10.69,52.46 12.92,52.46 12.92,55.54 16.98,55.54 XTAL.P$1
OSC_OUT  (via drill 0.3)
  Top 0.254: C12.2 18.06,51.3 XTAL.P$2 18.06,50.4 v15.7,50.4 | 10.91,51.9 12.6,51.9 v12.6,51.7
  Top 0.3: U1.P6 9.91,52.34 10.35,51.9 10.91,51.9
  Route3 0.254: v12.6,51.7 15.7,51.7 v15.7,50.4
PGND  (via drill 1)
  Top 0.406: C7.1 C5.1 22.33,17.9 19.8,17.9
  Top 0.7: BR2.P$18 BR2.P$19 BR2.P$20 | BR2.P$26 BR2.P$27 BR2.P$28 | BR1.P$28 BR1.P$27 BR1.P$26 BR1.P$27 | BR1.P$20 BR1.P$19 BR1.P$18 | BR1.P$20 28.5,21.43 28.5,21.6 | BR1.P$20 BR1.P$19 28.4,21.8
  Top 1.5: C11.- 10.75,5.3 v10.6,5.3 | 28.2,23.3 36.2,23.3 | 36.2,23.3 36.4,23.3 | 28.4,21.8 28.2,21.8 28.2,23.3 | BR1.P$27 36.2,21.43 36.2,23.3 | 28.2,23.3 19.1,23.3 19.2,23.4 | 19.2,23.4 14.2,23.4 | 14.2,23.4 6.4,23.4 BR2.P$19 | 19.8,22.3 19.8,23.4 19.2,23.4 | 19.1,4.1 19.05,4.05 POWER_CON.P$3 | BR2.P$27 14.4,23.2 14.2,23.4 | C10.- 32.07,4.8 v32.5,4.8
  Top 3: 19.8,22.3 19.8,17.9 19.8,16.2 17.2,13.7 17.2,9.3 19.1,7.5 19.1,4.1
  Route2 1.5: v10.6,5.3 16.1,5.3 18.85,2.55 18.85,2.21 POWER_CON.P$3 21.84,4.8 v32.5,4.8
SLAVE_RX  (via drill 0.3)
  Top 0.254: v5.4,52.7 v5.41,52.7 U1.P13
  Bottom 0.254: SL_DR.1 25.26,50.4 17.1,50.4 17.1,55.2 7.5,55.2 6.9,55.8 6.2,55.8 5.75,55.35 5.75,53.05 v5.4,52.7
SLAVE_TX  (via drill 0.3)
  Top 0.254: U1.P12 6.91,55 v6.65,55
  Bottom 0.254: SL_DR.4 23.76,49.9 16.6,49.9 16.6,54.7 6.91,54.7 6.91,55 v6.65,55
SLAVE_TX_EN  (via drill 0.3)
  Top 0.254: v23.3,47.2 24.26,47.2 SL_DR.3 24.26,49.86 22.1,49.86 22.1,52 19.6,52 19.35,51.8 16.05,51.8 15.2,50.9 15,50.9 15,49.45 U1.P43
  Bottom 0.254: SL_DR.3 24.26,47.2 v23.3,47.2
SLAVE_WR_BUS_A
  Bottom 0.254: M_DR.9 19.52,55 21.2,55 22,55.8 | 22,55.8 22.4,56.2 22.4,58.11 COMM.P$3 | SL_DR.6 23.26,54.54 22.4,55.4 | 22,55.8 22.4,55.4 | R31.1 28.52,57.49 R1.2 28.52,55.4 22.4,55.4
SLAVE_WR_BUS_B
  Bottom 0.254: COMM.P$4 20.14,55.5 19.02,55.5 M_DR.8 19.02,51.9 23.76,51.9 SL_DR.7 23.76,54.9 27.2,54.9 27.2,54.24 R24.2 29.2,54.24 29.2,55.05 31.77,55.05 ST.1
USB_D+
  Top 0.406: 33.1,51.71 R28.1 | 33.1,51.71 R27.1 | USB_CONN.3 33.7,49.75 33.7,50.7 33.1,50.7 33.1,51.71
USB_D-
  Top 0.406: USB_CONN.2 32.3,48.95 R26.1
USB_M  (via drill 0.3)
  Top 0.254: R26.2 31.1,49.82 v31.1,46.9 | v9.7,43.2 9.7,43.8 10.41,43.8 U1.P32
  Route3 0.254: v31.1,46.9 31.1,42.8 18.15,42.8 18.15,42.6 15.3,42.6 15.3,43 9.7,43 v9.7,43.2
USB_P  (via drill 0.3)
  Top 0.254: U1.P33 10.91,43 14.1,43 14.1,44.2 26.3,44.2 26.8,43.8 32.4,43.8 v32.4,45.1 | R27.2 31.61,51.7 31.61,48 v32.4,47.3
  Route3 0.254: v32.4,45.1 v32.4,47.3
VCC  (via drill 0.3, 0.5)
  Top 0.406: BR2.P$12 v6.4,38.3 | BR1.P$12 v28.4,38.2
  Route3 0.406: 20.9,37 7.5,37 7.5,37.2 v6.4,38.3 | v28.4,38.2 20.9,38.2 20.9,37 | 20.9,37 21.2,37 21.2,29.7 20.5,29 20.5,27.4 20.9,27 v20.9,26.4
  Bottom 0.7: v20.9,26.4 19.13,26.4 19.13,27.2
  Bottom 1.5: FET.S 19.13,27.2 19.13,23.67 19.8,23 | 23.9,3.8 23.9,2.16 POWER_CON.P$4
  Bottom 3: 19.8,23 19.8,16.4 17.2,13.9 17.2,9.5 21,5.8 21.9,5.8 23.9,3.8
VCC_AN  (via drill 0.3)
  Top 0.254: R22.1 20.64,39.28 R19.2 19.1,39.33 v19.1,39.5 | U1.P14 4.15,51.45 v4.1,51.9 U$1.P$4
  Route3 0.254: 5.75,50.4 5.8,50.45 | v4.1,51.9 5.75,51.05 5.75,50.4 | v19.1,39.5 5.4,39.5 5.4,42.6 5.75,42.95 5.75,50.4
VDDA  (via drill 0.3)
  Top 0.254: U1.P9 8.41,55.39 C2.2 8.65,56.14 8.65,56.85 8.15,57.35 7,57.35 v7,61.6 | U1.P25 | 5.41,45.5 U1.P24 5.41,44.95 6.6,44.95 U1.P25 | U1.P25 6.9,44 v4.85,44
  Top 0.406: M1_CON.P$7 41.1,17.37 v41.1,43.6
  Route2 0.406: v41.1,43.6 41.1,56.6 37.8,56.6 36.1,58.3 36.1,62 34.8,62 34.8,62.2 31.55,62.2 7.6,62.2 v7,61.6
  Route2 0.508: v31.6,61.7 31.55,61.7 31.55,62.2
  Bottom 0.254: 3.3,56.6 3.2,56.6 3.2,44 | 3.2,44 3.2,40.2 3.1,40.2 | 3.2,44 v4.85,44
  Bottom 0.3: 3.3,56.6 5.3,56.6
  Bottom 0.305: M2_CON.P$7 1.2,3.39 1.2,19.9 1.4,20.1 1.4,21.3
  Bottom 0.406: 5.3,56.6 7,58.3 v7,61.6 | C13.2 32.98,61.65 C14.2 33,59.94 L1.2 | 1.4,21.3 1.4,40.2 3.1,40.2
  Bottom 0.508: C13.2 31.6,61.66 v31.6,61.7
VIN
  Top 0.406: C1.2 24.37,53.9 25.2,53.9 25.6,54.3 26.6,54.3 26.8,54.1 VREG.3 | VREG.1 24.58,59.21 COMM.P$1
  Top 0.508: VREG.1 28.9,56 28.9,54.1 VREG.3
  Bottom 0.406: R10.1 26.68,60.2 23.8,60.2 23.8,59.21 COMM.P$1
VIN_AN  (via drill 0.3)
  Top 0.254: U1.P10 v7.91,56.59 v7.9,56.6 3.3,56.6 3.3,53.08 U$1.P$5
  Bottom 0.254: 7.9,56.54 v7.9,56.6 8.75,55.75 13.79,55.75 14.06,56.02 14.55,56.02 15.39,56.86 15.39,57.59 16.7,58.9
  Bottom 0.406: R10.2 R16.1 23.41,60.9 18.5,60.9 17.6,60 17.6,59.8 16.7,58.9
XTRA1
  Top 0.254: U1.P20 3.1,48.45 2,47.35 U$1.P$3
XTRA2
  Top 0.254: 2,44.6 U$1.P$2 2,44.5 3.35,45.85 3.35,47.75 3.55,47.95 U1.P21
XTRA3
  Top 0.254: U$1.P$1 3.55,43.37 3.9,43.72 3.9,47.35 4,47.45 U1.P22
XTRA4
  Top 0.254: U1.P37 13.91,46.2 21.25,46.2 U$2.P$1